# Altium PCB 4-Mode Regulator Schematic.PcbDoc
Units mm, origin at the board's own origin, x right, y up, seen from the top; angles counter-clockwise.
Board outline 122 x 51 mm, 2 copper layers (Top Layer, Bottom Layer); 23 components, 16 nets, 62 pads, 6 vias.
Unrouted connection lines stored in the file: 5.
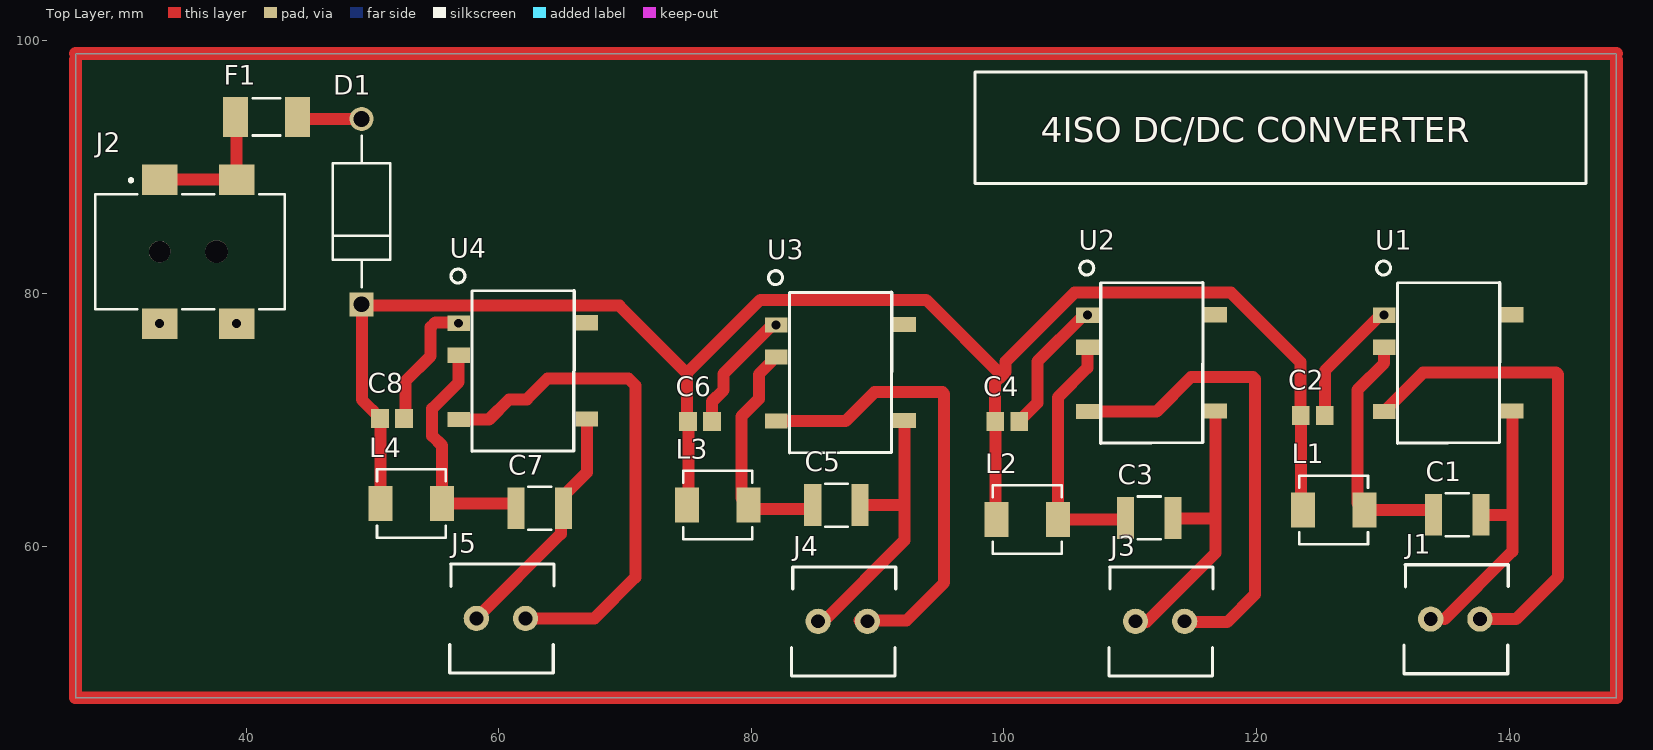
[diagram p0: Top Layer view]
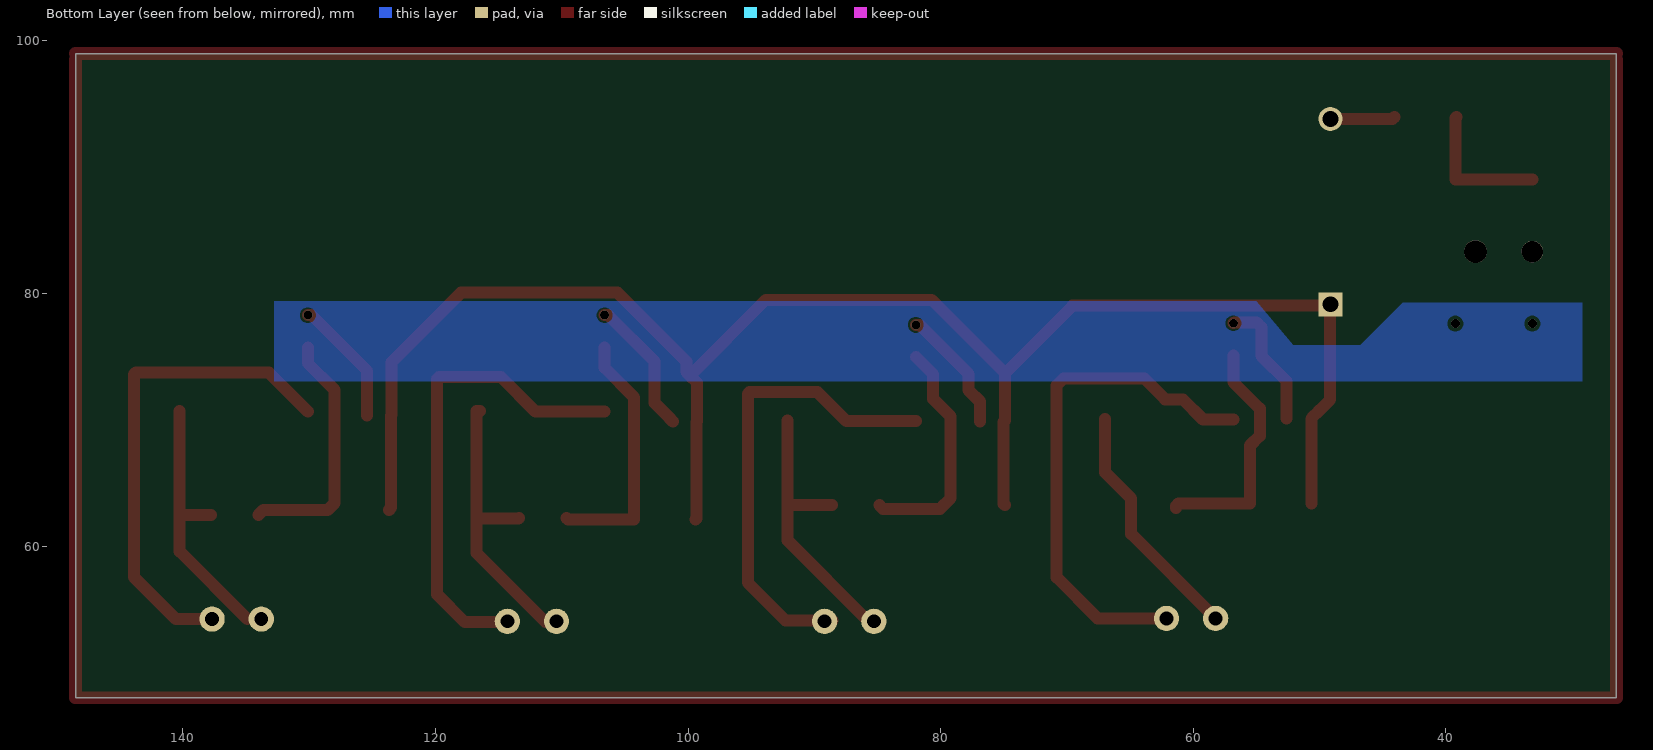
[diagram p1: Bottom Layer view, seen from below]
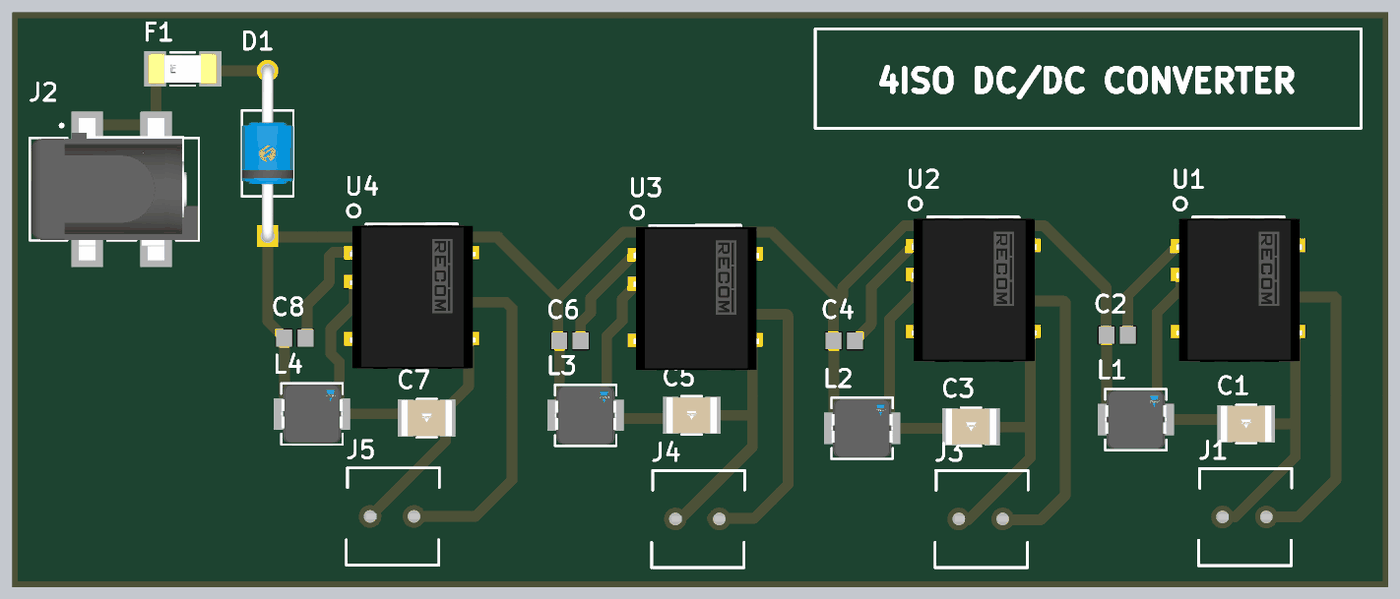
[diagram p2: 3D render of the assembled board from above, using the file's embedded part models]

## Layer stack, top to bottom
Top Solder: solder mask 0.0102, Solder Resist, Dk 3.5
Top Layer: signal copper 0.0356
Dielectric 1: dielectric 0.32, FR-4, Dk 4.8
Bottom Layer: signal copper 0.0356
Bottom Solder: solder mask 0.0102, Solder Resist, Dk 3.5

## Board outline
26.5,48 26.5,99 148.5,99 148.5,48

## Design rules (kind name [scope] priority, off if disabled: settings)
Clearance [All] p1: gap=0.254 ignorepadtopadclearanceinfootprint=FALSE
DiffPairsRouting [All] p1: maxlimit=10 minlimit=0.254 mostfreqgap=0.254 toplayer_minwidth=0.381 toplayer_maxwidth=10 toplayer_prefwidth=0.381 bottomlayer_minwidth=0.381 bottomlayer_maxwidth=10 bottomlayer_prefwidth=0.381 maxuncoupledlength=12.7
PolygonConnect [All] p1: thpad.connectstyle=Relief thpad.reliefconductorwidth=0.5 thpad.reliefentries=4 thpad.polygonreliefangle="90 Angle" thpad.airgapwidth=0.5 smdpad.connectstyle=Relief smdpad.reliefconductorwidth=0.25 smdpad.reliefentries=4 smdpad.polygonreliefangle="90 Angle" smdpad.airgapwidth=0.25 via.connectstyle=Direct via.reliefconductorwidth=0.25 via.reliefentries=4 via.polygonreliefangle="90 Angle" via.airgapwidth=0.25
RoutingCorners [All] p1: cornerstyle=Round minsetback=2.54 maxsetback=2.54
RoutingTopology [All] p1: topology=Daisy_Simple
RoutingVias [All] p1: holewidth=0.711 width=1.27 viastyle="Through Hole" minholewidth=0.711 minwidth=1.27 maxholewidth=0.711 maxwidth=1.27
SolderMaskExpansion [All] p1: expansion=0.102 istentingtop=FALSE
Width [All] p1: maxlimit=10 minlimit=0.254 preferedwidth=0.254 minimp=50.000000 maximp=50.000000 favimp=50.000000
27 further rules are at their usual default settings.

## Components (designator, comment, footprint, x,y, rotation, side; value= is the part's Value field where it differs from the comment)
C1 "HV1812Y471KXMATHV" FP-HV1812-IPC_C 135.89,62.484 r0 top
C2 "GRM21BR71C225KA12L" CAPC2013X135X50ML10T20 124.46,70.358 r0 top
C3 "HV1812Y471KXMATHV" FP-HV1812-IPC_C 111.506,62.23 r0 top
C4 "GRM21BR71C225KA12L" CAPC2013X135X50ML10T20 100.264,69.85 r0 top
C5 "HV1812Y471KXMATHV" FP-HV1812-IPC_C 86.741,63.246 r0 top
C6 "GRM21BR71C225KA12L" CAPC2013X135X50ML10T20 75.946,69.85 r0 top
C7 "HV1812Y471KXMATHV" FP-HV1812-IPC_C 63.25,63 r0 top
C8 "GRM21BR71C225KA12L" CAPC2013X135X50ML10T20 51.562,70.104 r0 top
D1 "1N5822" FP-B-Body-MFG 49.149,86.487 r90 top
F1 "0451003.MRL" FP-0451-MFG 41.618,93.98 r0 top value=0.0227Ω
J1 "282236-2" 282236-2 135.7,54.225 r0 top
J2 "PJ-002BH-SMT-TR" FP-PJ-002BH-SMT-TR-MFG 35.56,83.312 r0 top
J3 "282236-2" 282236-2 112.325,54.05 r0 top
J4 "282236-2" 282236-2 87.2,54.05 r0 top
J5 "282236-2" 282236-2 60.137,54.275 r0 top
L1 "IHLP2020BZER100M01" FP-IHLP-2020BZ-FP_1_905x2-MFG 126.111,62.865 r0 top
L2 "IHLP2020BZER100M01" FP-IHLP-2020BZ-FP_1_905x2-MFG 101.854,62.103 r0 top
L3 "IHLP2020BZER100M01" FP-IHLP-2020BZ-FP_1_905x2-MFG 77.343,63.246 r0 top
L4 "IHLP2020BZER100M01" FP-IHLP-2020BZ-FP_1_905x2-MFG 53.086,63.373 r0 top
U1 "8-SMD Module, 5 Leads" "8-SMD MODULE, 5 LEADS" 135.382,74.168 r270 top
U2 "8-SMD Module, 5 Leads" "8-SMD MODULE, 5 LEADS" 111.887,74.168 r270 top
U3 "8-SMD Module, 5 Leads" "8-SMD MODULE, 5 LEADS" 87.249,73.406 r270 top
U4 "8-SMD Module, 5 Leads" "8-SMD MODULE, 5 LEADS" 62.103,73.533 r270 top

## Footprints (in the part's own frame and the unit in brackets; to place one, negate y for a bottom-side part, rotate by r counter-clockwise, add the part's x,y. Pads: shape width x height; smd on the part's side, far side on the other; paste and mask are expansions set on the pad)
"8-SMD MODULE, 5 LEADS" [mm] "Footprint for 8-SMD Module, 5 Leads ICs"
  rect 1.2x1.8 smd paste-2539.97 mask-2539.97: 1(-4.113,-5.273) 2(-1.573,-5.273) 4(3.507,-5.273) 5(3.47,4.875) 8(-4.15,4.875)
  silkscreen extent -8.4,-5.87 6.03,3.88, body extent -6.58,-5.65 6.18,5.45, height 6.95
282236-2 [mm] "Modular Terminal Block, 13.5A, 1.5mm2, 1 Row(s), 1 Deck(s), 2 Screws"
  round 2 hole 1.1 paste-2539.97 mask-2539.97: 1(-1.905,0) 2(1.988,0)
  silkscreen extent -4.01,-4.33 4.24,4.3, body extent -3.81,-4.1 4.31,4.1, height 2.1
CAPC2013X135X50ML10T20 [mm] "Chip Capacitor, 2-Leads, Body 2.00x1.25mm, IPC Low Density"
  rect 1.4x1.5 smd: 1(-0.95,0) 2(0.95,0)
  body extent -1.05,-0.67 1.05,0.67, height 1.35
FP-0451-MFG [mil]
  rect 77x124 smd paste+0 mask+0: 1(-96.5,0) 2(96.5,0)
  silkscreen extent -43,-58 43,58, body extent -139,-66 139,66, height 10
FP-B-Body-MFG [mm]
  rect 1.9x1.9 hole 1.25 paste-2539.97 mask+0: 1(-7.341,0)
  round 1.9 hole 1.25 paste-2539.97 mask+0: 2(7.341,0)
  silkscreen extent -5.99,-2.28 5.99,2.28, body extent -8.39,-2.38 8.39,2.38, height 0.25
FP-HV1812-IPC_C [mm]
  rect 1.353x3.306 smd paste+0 mask+0: 1(-1.875,0) 2(1.875,0)
  silkscreen extent -0.9,-1.7 0.9,1.7, body extent -2.65,-1.8 2.65,1.8, height 0.25
FP-IHLP-2020BZ-FP_1_905x2-MFG [mm]
  rect 1.905x2.79 smd paste+0 mask+0: 1(-2.425,0) 2(2.425,0)
  silkscreen extent -2.72,-2.72 2.72,2.72, body extent -3.48,-2.82 3.48,2.82, height 0.25
FP-PJ-002BH-SMT-TR-MFG [mm]
  rect 2.8x2.4 smd paste+0 mask+0: 1(-2.4,5.7) 1(3.7,5.7) 2(-2.4,-5.7) 3(3.7,-5.7)
  round 1.7 hole 1.7 unplated paste-2539.97 mask+0: ""(-2.4,0)
  round 1.8 hole 1.8 unplated paste-2539.97 mask+0: ""(2.1,0)
  silkscreen extent -7.5,-4.55 7.5,5.77, body extent -7.6,-7 7.6,7, height 0.25

## Part data
C1 C3 C5 C7: library part CMP-02417-000043-1, "CAP CER 470PF 5KV X7R 1812", Capacitance=470pF, Case Code (Metric)=4532, Case Code (Imperial)=1812, Dielectric=X7R, Max Operating Temperature=125°C, Min Operating Temperature=-55°C, Tolerance=10%, Voltage Rating=5kV, Case/Package=1812, Length=0.177inch, Mount="Surface Mount", Packaging="Cut Tape", REACH SVHC="No SVHC", RoHS Compliant=Yes, Thickness=0.106inch, Voltage Rating (DC)=5kV, Width=0.126inch
C2 C4 C6 C8: library part CMP-2007-03455-1, Manufacturer=Murata, Part Number=GRM21BR71C225KA12L
D1: library part CMP-00252-09163648-1, "1N5822 Diode Schottky 40V 3A 2-Pin Axial B-MELF Bag - Bulk", Average Rectified Current=3A, Case/Package=Axial, Forward Voltage=700mV, Max Forward Surge Current (Ifsm)=80A, Max Junction Temperature (Tj)=125°C, Max Repetitive Reverse Voltage (Vrrm)=40V, Min Operating Temperature=-65°C, Peak Non-Repetitive Surge Current=150A, Peak Reverse Current=100µA, Contact Plating="Lead, Tin", Element Configuration=Single, Forward Current=3A, Height=3.61mm, Lifecycle Status=Production, Max Operating Temperature=125°C, Max Reverse Voltage (DC)=40V, Mount="Through Hole", NexarPartId=9163648, Number of Pins=2, Reverse Voltage=40V, RoHS=Compliant
F1: library part CMP-08605-000063-1, "FUSE BRD MNT 3A 125VAC/VDC 2SMD", Fuse Current=3A, Fuse Interrupt Ac Current=50A, Manufacturer="Littelfuse Inc", Max Fuse Ac Voltage=125V, Package=0451, Resistance=0.0227Ω, Temperature="-55°C to +125°C", Temperature Range High=+125°C, Temperature Range Low=-55°C, Automotive=No, Category=Fuse, ComponentLink2Description=Datasheet, ComponentLink2URL=https://www.littelfuse.com/~/media/electronics/datasheets/fuses/littelfuse_fuse_451_453_datasheet.pdf.pdf, Device Class L1="Circuit Protection", Device Class L2=Fuses, Device Class L3=unset, Digikey Description="FUSE BRD MNT 3A 125VAC/VDC 2SMD", Fuse Blow Speed=Fast, Fuse I2T=1.65A2Sec, Fuse Interrupt Dc Current=50A, Height=2.94mm, Lead Free=Yes, Manufacturer Part Number=0451003.MRL, Max Fuse Dc Voltage=125V, Mouser Description="Surface Mount Fuses 125V 3A", Octopart=https://octopart.com/0451003.mrl-littelfuse-566380, RoHS=TRUE, Voltage Rating=125V
J1 J3 J4 J5: "Modular Terminal Block, 13.5A, 1.5mm2, 1 Row(s), 1 Deck(s)", Current Rating=13.5A, Manufacturer="TE Connectivity", Manufacturer Part Number=282836-2, Manufacturer Series=282836, Supplier Part Number=4188728, Voltage Rating=300V, Category="Terminal Blocks", ComponentLink1Description=https://datasheet.ciiva.com:443/pdfs/VipMasterIC/IC/TYEL/TYEL-S-A0008743874/TYEL-S-A0008711552-1.pdf?src-supplier=IHS+Markit, ComponentLink1URL=https://datasheet.ciiva.com:443/pdfs/VipMasterIC/IC/TYEL/TYEL-S-A0008743874/TYEL-S-A0008711552-1.pdf?src-supplier=IHS+Markit, ComponentLink2Description=https://datasheet.ciiva.com/16393/282836-2-16393382.pdf?src-supplier=Future+Electronics, ComponentLink2URL=https://datasheet.ciiva.com/16393/282836-2-16393382.pdf?src-supplier=Future+Electronics, ComponentLink3Description=https://datasheet.ciiva.com/15169/getdatasheetpartid-155855-15169553.pdf?src-supplier=Verical, ComponentLink3URL=https://datasheet.ciiva.com/15169/getdatasheetpartid-155855-15169553.pdf?src-supplier=Verical, ComponentLink4Description=https://datasheet.ciiva.com/3141/eng-cs-1308389-eurostyle-terminal-blocks-0607-3141118.pdf?src-supplier=Avnet, ComponentLink4URL=https://datasheet.ciiva.com/3141/eng-cs-1308389-eurostyle-terminal-blocks-0607-3141118.pdf?src-supplier=Avnet, Fastening Method=SCREW, Mounting Technology=Board, Number of Decks=1, Number of Rows=1, Number of Ways=2, Pricing="300=0,37, 900=0,36, 1200=0,39, 1500=0,35, 3000=0,345, 4500=0,37, 6000=0,33 (USD)", Reach SVHC Compliant=No, RoHS=Yes, RoHS Compliant=Yes, Safety Approval=UL, Stock=130643, Supplier="Future Electronics", Terminal and Terminal Block Type="MODULAR TERMINAL BLOCK", Wire Cross Section=1.5mm2, Wire/Cable Gauge=15AWG
J2: library part CMP-2000-06897-2, "CONN PWR JACK 2.5X5.5MM SOLDER", Current Rating=5A, Manufacturer="CUI Inc", Package=0, Temperature="-25°C to +85°C", Temperature Range High=+85°C, Temperature Range Low=-25°C, Voltage Rating=24V, Automotive=No, Category=Conn, ComponentLink2Description=Datasheet, ComponentLink2URL=https://www.cuidevices.com/product/resource/digikeypdf/pj-002bh-smt-tr.pdf, Conn Gender=Male, Conn Orientation="Right Angle", Contact Material=Nickel,Silver, Device Class L1=Connectors, Device Class L2="Power Connectors", Device Class L3=unset, Digikey Description="CONN PWR JACK 2.5X5.5MM SOLDER", Height=11.43mm, Lead Free=Yes, Manufacturer Part Number=PJ-002BH-SMT-TR, Mouser Description="2.5 mm Center Pin, 5.0 A, Right Angle, Surface Mount (SMT), Dc Power Jack Connector", Number Of Contacts=3, Octopart=https://octopart.com/pj-002bh-smt-tr-cui-25947151, RoHS=TRUE, Standoff Height=0.1mm
L1 L2 L3 L4: library part CMP-02424-000159-1, "Fixed Inductors Commercial High Saturation Series 10uH 2.3A 199mΩ 20%", Case/Package=2020, Current Rating=2.3A, DC Resistance (DCR)=199mR, Max Operating Temperature=125°C, Min Operating Temperature=-55°C, Package Quantity=2000, Saturation Current=4A, Self Resonant Frequency=20MHz, Test Frequency=100kHz, Tolerance=20%, Inductance=10uH, Core Material=Ferrite, Depth=5.43mm, Height=2mm, Height - Seated (Max)=0.079inch, Lead Free="Lead Free", Length=5.49mm, Max DC Current=2.3A, Military Standard=Not, Mount="Surface Mount", Number of Pins=2020, Packaging="Tape and Reel", Radiation Hardening=No, RMS Current (Irms)=2.3A, Shielding=Shielded, Termination=SMD/SMT, Width=0.204inch, Inductance Tolerance=20%
U1 U2 U3 U4: "8-SMD Module, 5 Leads ICs", ComponentLink1Description=Datasheet, ComponentLink1URL=https://recom-power.com/pdf/Econoline/R1S_R1D.pdf, Created By="Arda Kara", Supplier 1=Digikey

## Via types
v1: diameter 0.711, hole 0.711, Top Layer to Bottom Layer, 6 vias

## Nets (pads, with @x,y where several pads share a name; then routed paths per layer and width w, separated by ;. In a path a pad name is that pad's centre, name@x,y a point inside that pad or via, vN(x,y) a via of type N, cw(c..) or ccw(c..) an arc to the next point about the centre after c; other vN are vias at no path point)
NetC1_1: C1.1 L1.2 U1.2 | length 19.6
  Top Layer w0.95: U1.2 130.109,74.484 128,72.375 128,63.401 L1.2 133.634,62.865 C1.1
NetC1_2: C1.2 J1.1 U1.5 | length 21.2
  Top Layer w0.95: 134.904,54.229 140.257,59.582 140.257,62.475 ; C1.2 140.248,62.484 140.257,62.475 ; U1.5 140.257,62.475
NetC2_1: C2.1 C4.1 C6.1 C8.1 D1.1 L1.1 L2.1 L3.1 L4.1 | length 137.4
  Top Layer w0.95: D1.1 D1.1@49.173,79.122 ; C8.1@50.038,70.727 49.173,71.591 D1.1@49.173,79.12 ; C8.1@50.039,70.727 50.612,70.154 C8.1 50.636,70.08 50.636,63.396 L4.1 ; L3.1 75.02,63.349 75.02,69.826 C6.1 ; C6.1 74.893,69.951 74.893,73.675 ; C4.1 99.29,69.873 99.29,72.946 99.847,73.503 ; C4.1 99.338,69.826 99.338,62.192 L2.1 ; C2.1@123.486,70.381 123.486,74.564 117.975,80.075 105.6,80.075 100.125,74.6 100.125,73.781 99.847,73.503 ; C2.1 123.51,63.041 L1.1 ; D1.1@49.173,79.12 49.231,79.063 69.587,79.063 69.587,78.982 74.893,73.675 ; 74.893,73.675 80.718,79.5 93.85,79.5 99.847,73.503
NetC2_2: C2.2 C4.2 C6.2 C8.2 J2.2 J2.3 U1.1 U2.1 U3.1 U4.1 | length 41.3
  Top Layer w0.95: C8.2@52.639,70.104 52.639,73.086 54.61,75.057 54.61,77.343 54.991,77.724 56.752,77.724 v1(56.83,77.646) ; C6.2 76.896,71.446 77.8,72.35 77.8,73.643 81.676,77.519 v1(81.976,77.519) ; C4.2 101.439,70.075 101.439,70.125 102.65,71.336 102.65,74.617 106.314,78.281 v1(106.614,78.281) ; C2.2 125.41,73.882 129.809,78.281 v1(130.109,78.281)
  other v1: 33.16,77.612 39.26,77.612
NetC3_1: C3.1 L2.2 U2.2 | length 20
  Top Layer w0.95: U2.2 106.614,74.114 104.279,71.779 L2.2 109.504,62.103 C3.1
NetC3_2: C3.2 J3.1 U2.5 | length 22.7
  Top Layer w0.95: J3.1@111.275,53.975 116.762,59.462 116.762,62.2 ; C3.2 113.411,62.2 116.762,62.2 ; U2.5@116.462,70.698 U2.5 116.762,62.2
NetC5_1: C5.1 L3.2 U3.2 | length 18.4
  Top Layer w0.95: U3.2 80.596,73.599 80.596,71.646 79.213,70.263 79.213,63.801 L3.2 80.061,62.954 84.573,62.954 C5.1
NetC5_2: C5.2 J4.1 U3.5 | length 22
  Top Layer w0.95: J4.1@85.777,54.102 92.124,60.449 92.124,63.275 ; C5.2 92.095,63.246 92.124,63.275 ; U3.5 92.124,63.275
NetC7_1: C7.1 L4.2 U4.2 | length 19
  Top Layer w0.95: U4.2 56.83,72.978 54.737,70.885 54.737,68.738 55.511,67.963 L4.2 61.173,63.373 61.375,63.171 C7.1
NetC7_2: C7.2 J5.1 U4.5 | length 19.4
  Top Layer w0.95: J5.1 64.924,60.966 64.924,63.775 66.978,65.829 U4.5
NetD1_2: D1.2 F1.2 | length 5.1
  Top Layer w0.95: F1.2 44.221,93.828 D1.2
NetF1_1: F1.1 J2.1 | length 11.1
  Top Layer w0.95: J2.1@33.16,89.012 39.26,89.012 39.26,93.887 F1.1
NetJ1_2: J1.2 U1.4 | length 38.6
  Top Layer w0.95: U1.4 133.198,73.75 143.726,73.75 143.875,73.601 143.875,57.55 140.554,54.229 J1.2@137.842,54.229
NetJ3_2: J3.2 U2.4 | length 37.9
  Top Layer w0.95: U2.4 112.095,70.661 114.808,73.375 119.726,73.375 119.875,73.226 119.875,56.175 117.675,53.975 J3.2@114.387,53.975
NetJ4_2: J4.2 U3.4 | length 37.2
  Top Layer w0.95: U3.4 87.457,69.899 89.755,72.197 95.129,72.197 95.278,72.048 95.278,57.103 92.277,54.102 J4.2@88.566,54.102
NetJ5_2: J5.2 U4.4 | length 40.8
  Top Layer w0.95: U4.4 59.231,70.026 60.833,71.628 62.23,71.628 63.881,73.279 70.269,73.279 70.825,72.723 70.825,57.525 67.575,54.275 J5.2
pads on no net: J2. U1.8 U2.8 U3.8 U4.8
copper on no net: | length 345
  Top Layer w1: 26.5,98.5 26.5,48 148.5,48 148.5,98.5 ; 26.5,99 148.5,99

## Polygon pours and split planes (outlines as drawn)
no net on Bottom Layer "NONET_L02_P000" (solid, pour order 0): 29.227,79.275 29.65,79.275 43.425,79.275 46.8,75.9 52.075,75.9 55,79.4 132.75,79.4 132.75,73.05 29.227,73.05

## Silkscreen, mask and mechanical layers (free items; w line width, h text height)
Top Overlay:
  lines w0.25: 97.7,88.7 146.075,88.7 146.075,97.55 97.7,97.55 97.7,88.7
  text "4ISO DC/DC CONVERTER" at 102.9,91.975 h2